# EAGLE board uC board (EAGLE 9.4.1)
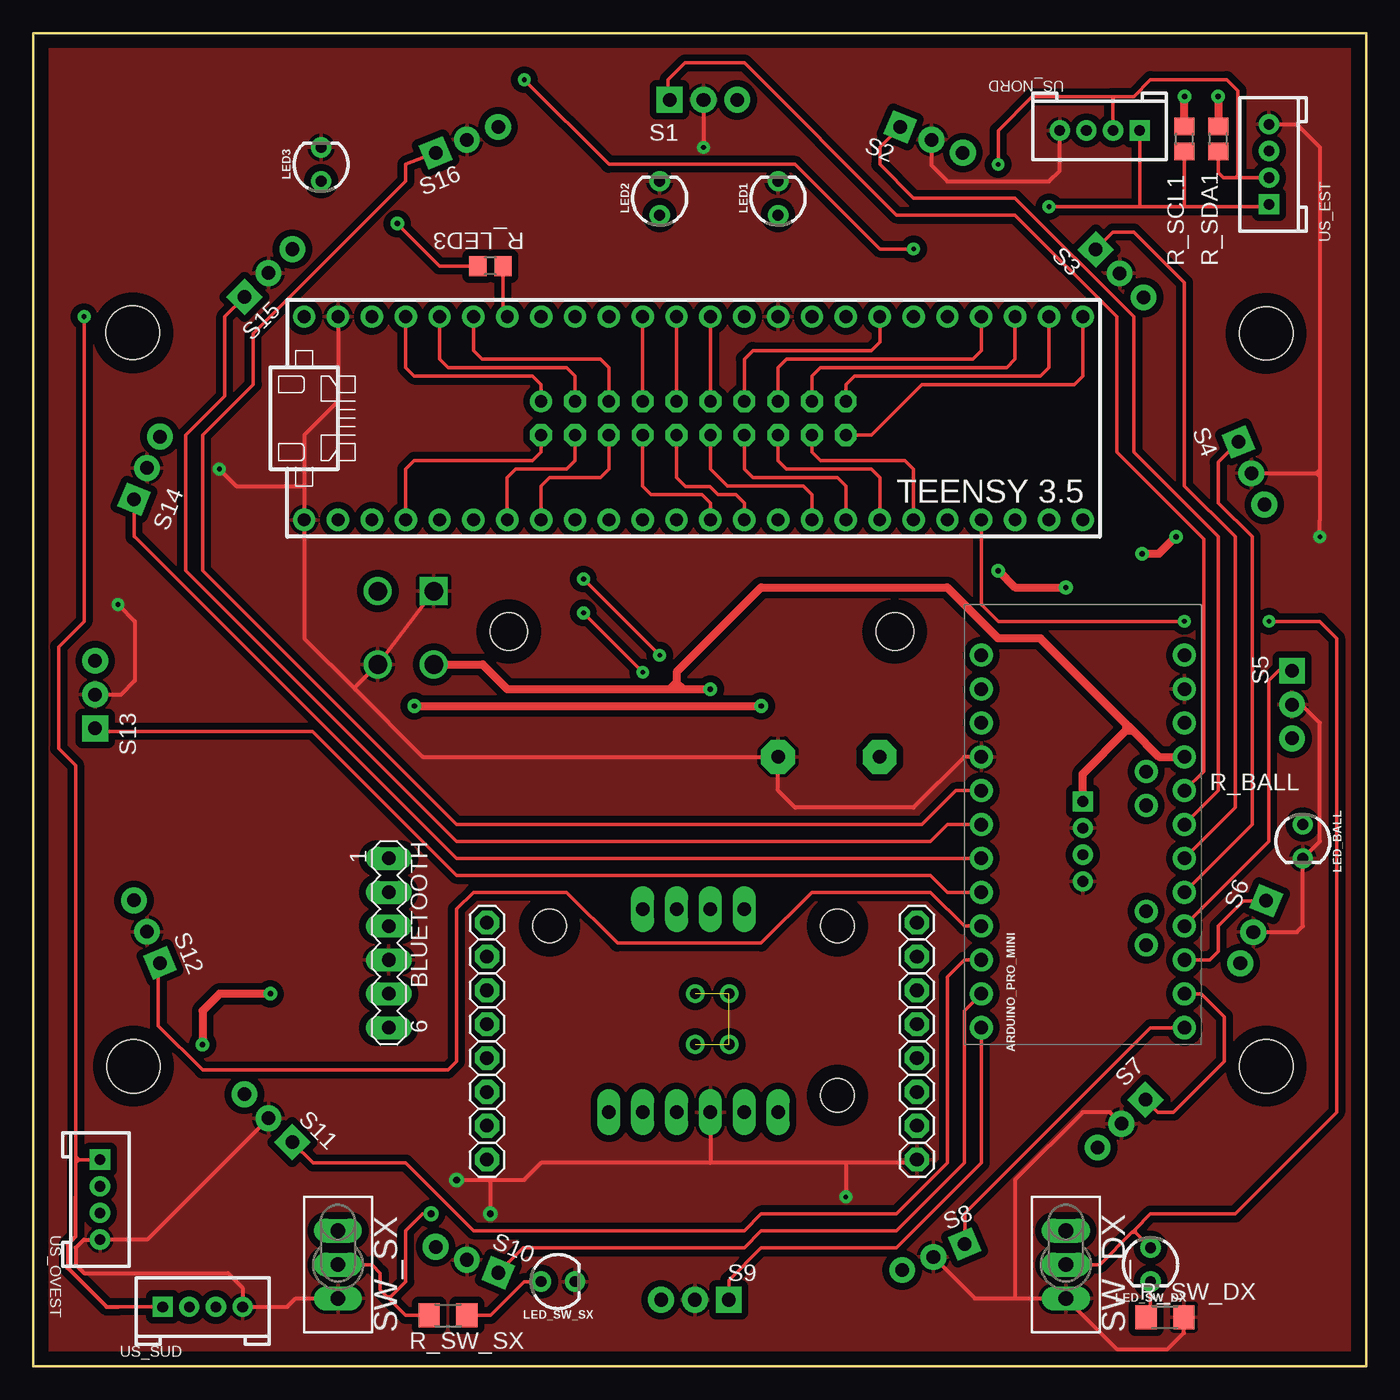
[diagram p0: board, top side]
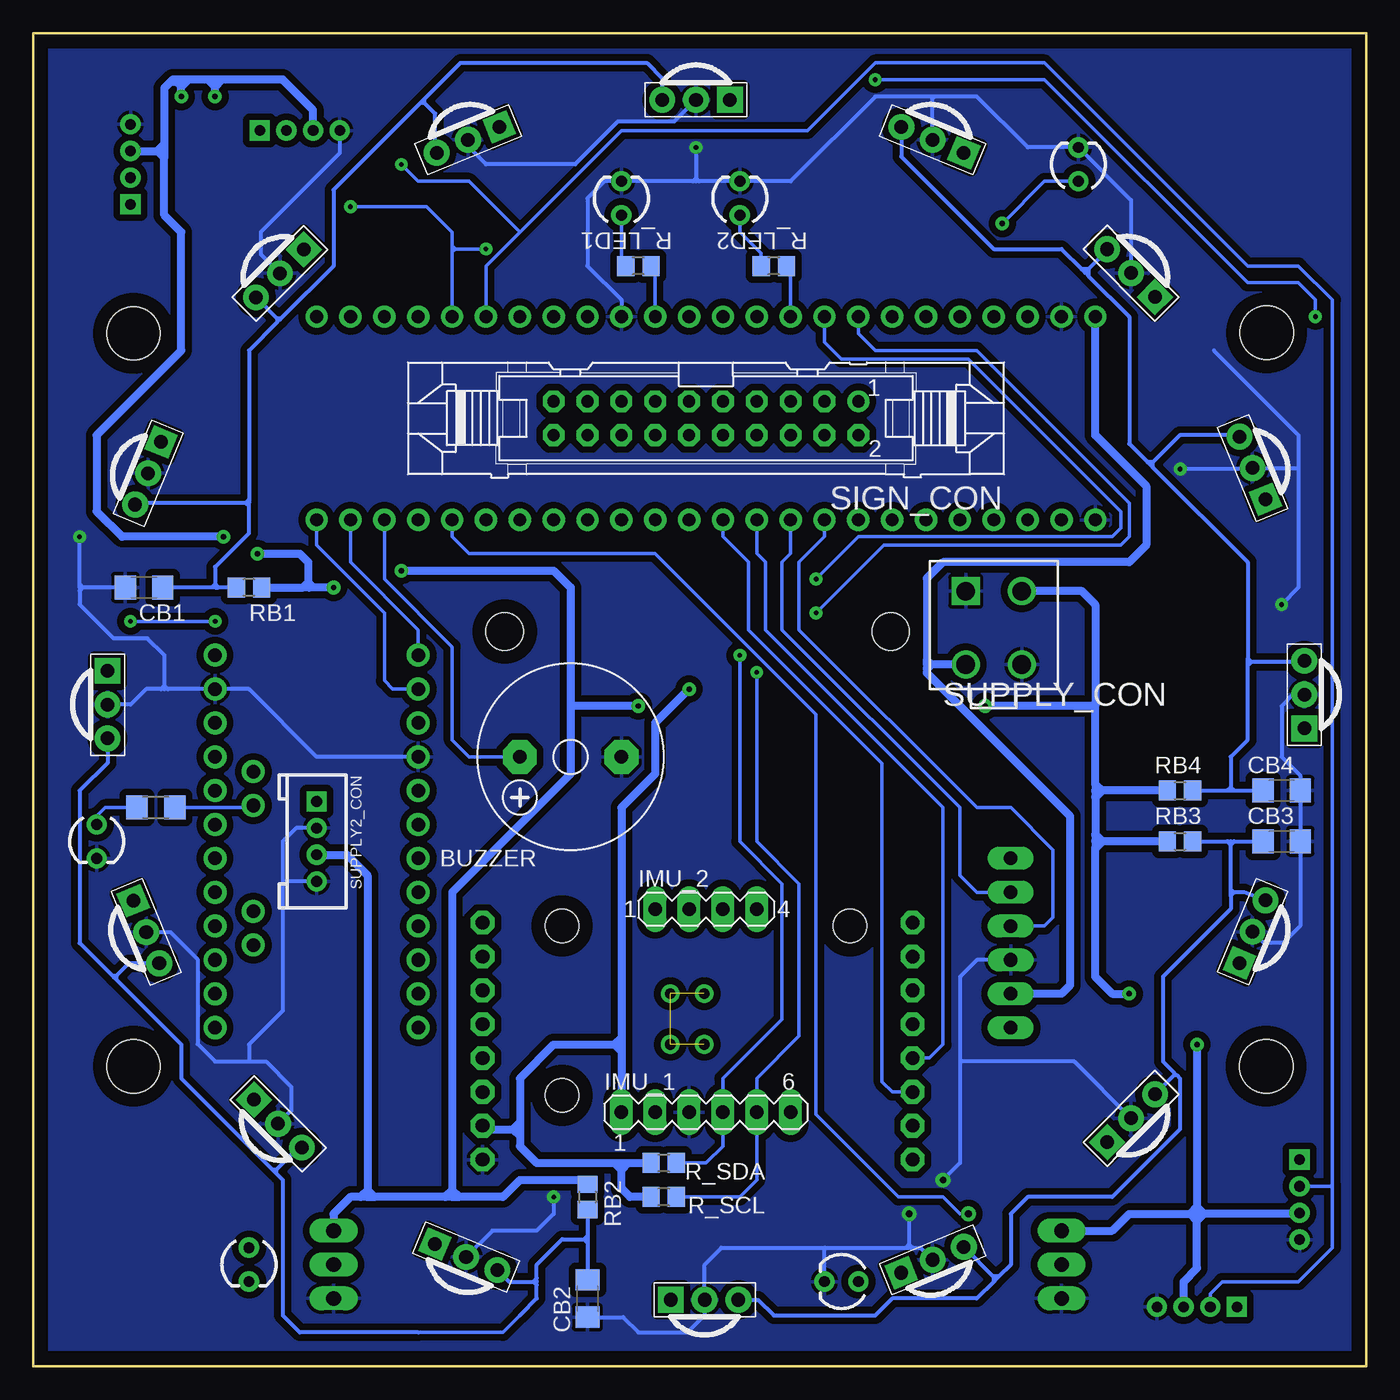
[diagram p1: board, bottom side, seen from below]

Size 100 x 100 mm. Coordinates in mm from the lower left corner, seen from the top.
Outline: 0,0 100,0 100,100 0,100 0,0
Copper layers (1*16): Top 0.035mm / dielectric 1.5mm / Bottom 0.035mm
Design rules "default *": minimum track width 6mil, minimum drill 0.35mm, track to track 5mil, track to pad 7mil, pad to pad 10mil, via to via 10mil, smd to smd 6mil, copper to edge 40mil, drill to drill 6mil, minimum pad ring 14mil, minimum via ring 12mil, stop-mask expansion 4mil, vias tented up to drill 0mil, thermal gap 10mil
Net classes: 0 signal: width 0.254 mm, clearance 0.254 mm; 1 Power: width 0.305 mm, clearance 0.305 mm; 2 +5V/1: width 0.61 mm, drill 0.406 mm, clearance 0.457 mm
Holes 2.8 mm at 64.64,55.12 35.68,55.12
Holes 2.54 mm at 60.33,33.02 38.73,33.02 60.33,20.32
Holes 4 mm at 92.5,77.5 7.46,77.54 92.5,22.5 7.5,22.5

## Footprints (pad centres in the part's own frame; a part is rotated, then mirrored left to right if it is on the bottom)
ARDUINO_PRO_MINI = drill 1.016: 1 -7.62,12.7; 2 -7.62,10.16; 3 -7.62,7.62; 4 -7.62,5.08; 5 -7.62,2.54; 6 -7.62,0; 7 -7.62,-2.54; 8 -7.62,-5.08; 9 -7.62,-7.62; 10 -7.62,-10.16; 11 -7.62,-12.7; 12 -7.62,-15.24; 13 7.62,-15.24; 14 7.62,-12.7; 15 7.62,-10.16; 16 7.62,-7.62; 17 7.62,-5.08; 18 7.62,-2.54; 19 7.62,0; 20 7.62,2.54; 21 7.62,5.08; 22 7.62,7.62; 23 7.62,10.16; 24 7.62,12.7; A4 4.763,1.429; A5 4.763,3.969; A6 4.763,-9.049; A7 4.763,-6.509
MA06-1 = drill 1.016 long: 1 -6.35,0; 2 -3.81,0; 3 -1.27,0; 4 1.27,0; 5 3.81,0; 6 6.35,0
F/CM12P = drill 1.016 pad 2.54 octagon: + 3.81,0; - -3.81,0
C1206 = smd 1.6 x 1.8: 1 -1.4,0; 2 1.4,0
MA04-1 = drill 1.016 long: 1 -3.81,0; 2 -1.27,0; 3 1.27,0; 4 3.81,0
39-28-1043 = drill 1.4 pad 2.1 square: 1 -2.1,7.35 | drill 1.4 pad 2.1: 2 2.1,7.35; 3 -2.1,1.85; 4 2.1,1.85
LED_3MM = drill 0.813: A -1.27,0; K 1.27,0
R1206 = smd 1.6 x 1.803: 1 -1.422,0; 2 1.422,0
R0805 = smd 1.3 x 1.5: 1 -0.95,0; 2 0.95,0
PNA460XM = drill 1.016 pad 1.93 square: 1 -2.54,0 | drill 1.016 pad 1.93: 2 0,0; 3 2.54,0
20V = drill 0.914: 1 -11.43,-1.27 | drill 0.914 octagon: 2 -11.43,1.27; 3 -8.89,-1.27; 4 -8.89,1.27; 5 -6.35,-1.27; 6 -6.35,1.27; 7 -3.81,-1.27; 8 -3.81,1.27; 9 -1.27,-1.27; 10 -1.27,1.27; 11 1.27,-1.27; 12 1.27,1.27; 13 3.81,-1.27; 14 3.81,1.27; 15 6.35,-1.27; 16 6.35,1.27; 17 8.89,-1.27; 18 8.89,1.27; 19 11.43,-1.27; 20 11.43,1.27
2.0_1X4 = drill 0.8 pad 1.27 square: 1 -3,0 | drill 0.8 pad 1.27: 2 -1,0; 3 1,0; 4 3,0
TL3XPO = drill 1.1 pad 1.422 long: 1 -2.54,0; 2 0,0; 3 2.54,0
TEENSY_3.5/3.6 = drill 0.965: 0/RX -25.4,-7.62; 1/TX -22.86,-7.62; 2 -20.32,-7.62; 3/CANTX -17.78,-7.62; 3V3 7.62,-7.62; 3V3_LO -22.86,7.62; 4/CANRX -15.24,-7.62; 5 -12.7,-7.62; 6 -10.16,-7.62; 7 -7.62,-7.62; 8 -5.08,-7.62; 9/CS -2.54,-7.62; 10/CS 0,-7.62; 11/MOSI 2.54,-7.62; 12/MISO 5.08,-7.62; 13/SCK 5.08,7.62; 14/A0 2.54,7.62; 15/A1 0,7.62; 16/A2 -2.54,7.62; 17/A3 -5.08,7.62; 18/A4/SDA -7.62,7.62; 19/A5/SCL -10.16,7.62; 20/A6 -12.7,7.62; 21/A7 -15.24,7.62; 21/DAC0 12.7,7.62; 22/A8 -17.78,7.62; 23/A9 -20.32,7.62; 24 10.16,-7.62; 25 12.7,-7.62; 26 15.24,-7.62; 27 17.78,-7.62; 28 20.32,-7.62; 29 22.86,-7.62; 30 25.4,-7.62; 31/A12 27.94,-7.62; 32/A13 30.48,-7.62; 33/A14 30.48,7.62; 34/A15 27.94,7.62; 35/A16 25.4,7.62; 36/A17 22.86,7.62; 37/A18 20.32,7.62; 38/A19 17.78,7.62; 39/A20 15.24,7.62; A22/DAC1 10.16,7.62; AGND -25.4,7.62; GND -27.94,-7.62; GND2 7.62,7.62; VIN -27.94,7.62
OPENMV3 = drill 1.016 pad 1.778 octagon: 11 1.651,19.304; 12 1.651,16.764; 13 1.651,14.224; 14 1.651,11.684; 15 1.651,9.144; 16 1.651,6.604; 17 1.651,4.064; 18 1.651,1.524; 21 33.909,19.304; 22 33.909,16.764; 23 33.909,14.224; 24 33.909,11.684; 25 33.909,9.144; 26 33.909,6.604; 27 33.909,4.064; 28 33.909,1.524

## Placement (x,y rotation side)
ARDUINO_PRO_MINI  ARDUINO_PRO_MINI  [ARDUINO_PRO_MINI]  78.74,40.64 0 top
BLUETOOTH  [MA06-1]  26.67,31.75 270 top
BUZZER  F/CM12P  [F/CM12P]  59.69,45.72 180 bottom
CB1  0.1uF  [C1206]  91.69,58.42 180 bottom
CB2  0.1uF  [C1206]  58.42,5.08 270 bottom
CB3  0.1uF  [C1206]  6.35,39.37 0 bottom
CB4  0.1uF  [C1206]  6.35,43.18 0 bottom
IMU_1  [MA06-1]  49.53,19.05 0 bottom
IMU_2  [MA04-1]  49.53,34.29 0 bottom
J1  39-28-1043  [39-28-1043]  27.94,50.8 0 bottom
LED1  [LED_3MM]  55.88,87.63 90 top
LED2  [LED_3MM]  46.99,87.63 90 top
LED3  [LED_3MM]  21.59,90.17 90 top
LED_BALL  [LED_3MM]  95.25,39.37 270 top
LED_SW_DX  [LED_3MM]  83.82,7.62 270 top
LED_SW_SX  [LED_3MM]  39.37,6.35 0 top
R_BALL  330  [R1206]  90.81,41.91 0 bottom
R_LED1  68/75  [R0805]  54.61,82.55 180 bottom
R_LED2  68/75  [R0805]  44.45,82.55 180 bottom
R_LED3  68/75  [R0805]  34.29,82.55 180 top
R_SCL  3.3k  [R0805]  52.7,12.7 180 bottom
R_SCL1  3.3k  [R0805]  86.36,92.08 90 top
R_SDA  3.3k  [R0805]  52.7,15.24 180 bottom
R_SDA1  3.3k  [R0805]  88.9,92.08 90 top
R_SW_DX  330  [R1206]  84.9,3.68 180 top
R_SW_SX  330  [R1206]  31.11,3.81 180 top
RB1  33  [R0805]  83.82,58.42 180 bottom
RB2  33  [R0805]  58.42,12.7 270 bottom
RB3  33  [R0805]  13.97,39.37 0 bottom
RB4  33  [R0805]  13.97,43.18 0 bottom
S1  PNA460XM  [PNA460XM]  50.28,95.01 180 bottom
S2  PNA460XM  [PNA460XM]  67.39,92.01 202.5 bottom
S3  PNA460XM  [PNA460XM]  81.5,81.99 225 bottom
S4  PNA460XM  [PNA460XM]  91.39,66.99 247.5 bottom
S5  PNA460XM  [PNA460XM]  94.43,49.64 270 bottom
S6  PNA460XM  [PNA460XM]  91.53,32.57 292.5 bottom
S7  PNA460XM  [PNA460XM]  81.64,18.19 315 bottom
S8  PNA460XM  [PNA460XM]  67.53,8.19 337.5 bottom
S9  PNA460XM  [PNA460XM]  49.64,4.98 0 bottom
S10  PNA460XM  [PNA460XM]  32.53,7.98 22.5 bottom
S11  PNA460XM  [PNA460XM]  17.64,18.6 45 bottom
S12  PNA460XM  [PNA460XM]  8.53,32.6 67.5 bottom
S13  PNA460XM  [PNA460XM]  4.64,50.39 90 bottom
S14  PNA460XM  [PNA460XM]  8.53,67.39 112.5 bottom
S15  PNA460XM  [PNA460XM]  17.64,82.01 135 bottom
S16  PNA460XM  [PNA460XM]  32.53,92.01 157.5 bottom
SIGN_CON  [20V]  49.53,71.12 180 bottom
SUPPLY2_CON  TWIG_2.0  [2.0_1X4]  78.74,39.37 270 bottom
SW_DX  TL38PO  [TL3XPO]  77.47,7.62 270 top
SW_SX  TL38PO  [TL3XPO]  22.86,7.62 270 top
TEENSY_3.5  TEENSY_3.5/3.6  [TEENSY_3.5/3.6]  48.26,71.12 0 top
U$2  OPENMV3  [OPENMV3]  32.38,13.97 0 top
US_EST  TWIG_2.0  [2.0_1X4]  92.71,90.17 90 top
US_NORD  TWIG_2.0  [2.0_1X4]  80.01,92.71 180 top
US_OVEST  TWIG_2.0  [2.0_1X4]  5,12.5 270 top
US_SUD  TWIG_2.0  [2.0_1X4]  12.7,4.45 0 top

## Library data of the parts
ARDUINO_PRO_MINI = SparkFun-Boards
BLUETOOTH IMU_1 IMU_2 = con-lstb; OC_FARNELL: unknown; OC_NEWARK: unknown
BUZZER = buzzer; OC_FARNELL: unknown; OC_NEWARK: unknown
CB1-CB4 = rcl; SPICEPREFIX: C
J1 = 39-28-1043; DESCRIPTION: Mini-Fit Jr. Vertical Header, 4.20mm Pitch, Dual Row, 4 Circuits, without Snap-in Plastic Peg PCB Lock, Tin, Natural; HEIGHT: mm; MANUFACTURER_NAME: Molex; MANUFACTURER_PART_NUMBER: 39-28-1043; MOUSER_PART_NUMBER: 538-39-28-1043; MOUSER_PRICE-STOCK: https://www.mouser.com/Search/Refine.aspx?Keyword=538-39-28-1043; RS_PART_NUMBER: 4841899P; RS_PRICE-STOCK: http://uk.rs-online.com/web/p/products/4841899P
LED1-LED3 LED_BALL LED_SW_DX LED_SW_SX = SparkFun-LED; PROD_ID: DIO-08794
R_BALL R_LED1-R_LED3 R_SCL R_SCL1 R_SDA R_SDA1 R_SW_DX R_SW_SX RB1-RB4 = rcl; SPICEPREFIX: R
S1-S16 = Adafruit
SIGN_CON = con-harting-v-edit; OC_FARNELL: unknown; OC_NEWARK: unknown
SUPPLY2_CON US_EST US_NORD US_OVEST US_SUD = CONNECTER
SW_DX SW_SX = switch
TEENSY_3.5 = Teensy356
U$2 = openmv

## Nets
+5V: ARDUINO_PRO_MINI.21 BLUETOOTH.5 IMU_1.1 J1.3 R_SCL.2 R_SDA.2 SUPPLY2_CON.1 TEENSY_3.5.VIN U$2.27
+5V/S [+5V/1]: J1.2 R_SCL1.2 R_SDA1.2 RB1.1 RB2.1 RB3.1 RB4.1 SUPPLY2_CON.3 SW_DX.1 SW_SX.1 US_EST.3 US_NORD.3 US_OVEST.3 US_SUD.3
A21: TEENSY_3.5.21/DAC0
A22: TEENSY_3.5.A22/DAC1
BUZZ: BUZZER.+ TEENSY_3.5.30
GND [Power]: ARDUINO_PRO_MINI.4 ARDUINO_PRO_MINI.23 BLUETOOTH.4 BUZZER.- CB1.2 CB2.2 CB3.2 CB4.2 IMU_1.3 J1.1 J1.4 LED1.K LED2.K LED3.K LED_BALL.K LED_SW_SX.K R_SW_DX.1 S1.2 S2.2 S3.2 S4.2 S5.2 S6.2 S7.2 S8.2 S9.2 S10.2 S11.2 S12.2 S13.2 S14.2 S15.2 S16.2 SUPPLY2_CON.2 SUPPLY2_CON.4 SW_DX.3 SW_SX.3 TEENSY_3.5.AGND TEENSY_3.5.GND TEENSY_3.5.GND2 U$2.28 US_EST.4 US_NORD.4 US_OVEST.4 US_SUD.4
M1_INA: SIGN_CON.8 TEENSY_3.5.11/MOSI
M1_INB: SIGN_CON.10 TEENSY_3.5.12/MISO
M1_PWM: SIGN_CON.2 TEENSY_3.5.2
M2_INA: SIGN_CON.12 TEENSY_3.5.24
M2_INB: SIGN_CON.14 TEENSY_3.5.25
M2_PWM: SIGN_CON.4 TEENSY_3.5.5
M3_INA: SIGN_CON.16 TEENSY_3.5.26
M3_INB: SIGN_CON.18 TEENSY_3.5.27
M3_PWM: SIGN_CON.6 TEENSY_3.5.6
M4_INA: SIGN_CON.3 TEENSY_3.5.22/A8
M4_INB: SIGN_CON.5 TEENSY_3.5.21/A7
M4_PWM: SIGN_CON.1 TEENSY_3.5.23/A9
N$1: R_LED1.1 TEENSY_3.5.13/SCK
N$2: LED1.A R_LED1.2
N$3: LED_BALL.A R_BALL.1
N$4: ARDUINO_PRO_MINI.A4 R_BALL.2
N$5: LED_SW_SX.A R_SW_SX.1
N$6: LED2.A R_LED2.2
N$7: LED3.A R_LED3.2
N$8: R_LED3.1 TEENSY_3.5.20/A6
N$9: LED_SW_DX.K R_SW_DX.2
N$10: R_LED2.1 TEENSY_3.5.17/A3
POWER_BLOK_1: CB2.1 RB2.2 S5.3 S6.3 S7.3 S8.3
POWER_BLOK_2: CB1.1 RB1.2 S1.3 S2.3 S3.3 S4.3
POWER_BLOK_3: CB3.1 RB3.2 S9.3 S10.3 S11.3 S12.3
POWER_BLOK_4: CB4.1 RB4.2 S13.3 S14.3 S15.3 S16.3
RAW: ARDUINO_PRO_MINI.24
RX1: TEENSY_3.5.0/RX
RX2: TEENSY_3.5.9/CS U$2.15
RX3: BLUETOOTH.3 TEENSY_3.5.7
RX4: ARDUINO_PRO_MINI.1 TEENSY_3.5.31/A12
S1_IN: SIGN_CON.20 TEENSY_3.5.33/A14
S1_OUT: SIGN_CON.19 TEENSY_3.5.34/A15
S2_IN: SIGN_CON.17 TEENSY_3.5.35/A16
S2_OUT: SIGN_CON.15 TEENSY_3.5.36/A17
S3_IN: SIGN_CON.13 TEENSY_3.5.39/A20
S3_OUT: SIGN_CON.11 TEENSY_3.5.14/A0
S4_IN: SIGN_CON.9 TEENSY_3.5.15/A1
S4_OUT: SIGN_CON.7 TEENSY_3.5.16/A2
SCL1: R_SCL1.1 TEENSY_3.5.37/A18 US_EST.1 US_NORD.1 US_OVEST.1 US_SUD.1
SCL_I2C: IMU_1.5 R_SCL.1 TEENSY_3.5.19/A5/SCL
SCL_I2C2: TEENSY_3.5.3/CANTX
SDA1: R_SDA1.1 TEENSY_3.5.38/A19 US_EST.2 US_NORD.2 US_OVEST.2 US_SUD.2
SDA_I2C: IMU_1.4 R_SDA.1 TEENSY_3.5.18/A4/SDA
SDA_I2C2: TEENSY_3.5.4/CANRX
SP1: ARDUINO_PRO_MINI.20 S1.1
SP2: ARDUINO_PRO_MINI.19 S2.1
SP3: ARDUINO_PRO_MINI.18 S3.1
SP4: ARDUINO_PRO_MINI.17 S4.1
SP5: ARDUINO_PRO_MINI.16 S5.1
SP6: ARDUINO_PRO_MINI.15 S6.1
SP7: ARDUINO_PRO_MINI.14 S7.1
SP8: ARDUINO_PRO_MINI.13 S8.1
SP9: ARDUINO_PRO_MINI.12 S9.1
SP10: ARDUINO_PRO_MINI.11 S10.1
SP11: ARDUINO_PRO_MINI.10 S11.1
SP12: ARDUINO_PRO_MINI.9 S12.1
SP13: ARDUINO_PRO_MINI.8 S13.1
SP14: ARDUINO_PRO_MINI.7 S14.1
SP15: ARDUINO_PRO_MINI.6 S15.1
SP16: ARDUINO_PRO_MINI.5 S16.1
SW_DX: LED_SW_DX.A SW_DX.2 TEENSY_3.5.29
SW_SX: R_SW_SX.2 SW_SX.2 TEENSY_3.5.28
TX1: TEENSY_3.5.1/TX
TX2: TEENSY_3.5.10/CS U$2.16
TX3: BLUETOOTH.2 TEENSY_3.5.8
TX4: ARDUINO_PRO_MINI.2 TEENSY_3.5.32/A13

## Tracks (layer width: path | path; a pad name or v marks a point on that pad's centre or on a via)
+5V  (via drill 0.41)
  Top 0.61: J1.3 33.71,52.65 35.56,50.8 47.75,50.8 | 47.75,50.8 48.26,50.8 | 48.26,50.8 48.77,50.8 | 48.77,50.8 v50.8,50.8 | 48.26,50.8 48.26,51.31 | 48.26,51.31 48.26,52.07 54.61,58.42 68.58,58.42 72.39,54.61 75.56,54.61 81.98,48.2 | ARDUINO_PRO_MINI.21 84.45,45.72 82.49,47.69 | 82.49,47.69 82.23,47.94 | 82.23,47.94 81.98,48.2 | 47.75,50.8 48.26,51.31 | 48.26,51.31 48.77,50.8 | SUPPLY2_CON.1 78.74,44.45 81.98,47.69 | 82.23,47.94 81.98,47.69 | 81.98,48.2 81.98,47.69 | 81.98,47.69 82.49,47.69
  Bottom 0.61: TEENSY_3.5.VIN 20.32,69.85 16.51,66.04 16.51,61.59 17.78,60.33 31.75,60.33 32.96,59.12 32.96,52.96 | 32.96,52.96 32.96,52.7 | 32.96,52.7 32.96,52.32 | 32.96,52.32 32.96,52.01 22.23,41.27 22.23,28.57 22.86,27.94 BLUETOOTH.5 | J1.3 32.63,52.65 | 32.63,52.65 32.9,52.65 32.96,52.7 | 32.96,52.32 32.63,52.65 | 32.63,52.65 32.94,52.96 32.96,52.96 | v50.8,50.8 53.34,48.26 53.34,44.45 55.88,41.91 55.88,24.64 | 55.88,24.64 55.88,24.13 | 55.88,24.13 55.88,23.62 | 55.88,23.62 IMU_1.1 | 55.88,24.13 56.39,24.13 | 56.39,24.13 60.96,24.13 63.5,21.59 63.5,18.29 | 63.5,18.29 63.5,17.78 | 63.5,17.78 63.5,17.27 | 63.5,17.27 63.5,16.51 62.23,15.24 56.39,15.24 | 56.39,15.24 55.88,15.24 | 55.88,15.24 55.37,15.24 | 55.37,15.24 R_SDA.2 | R_SCL.2 55.24,12.7 55.88,13.34 55.88,14.73 | 55.88,14.73 55.88,15.24 | U$2.27 66.04,17.78 64.01,17.78 | 63.5,17.78 64.01,17.78 | 63.5,18.29 64.01,17.78 | 64.01,17.78 63.5,17.27 | 55.37,15.24 55.88,14.73 | 55.88,14.73 56.39,15.24 | 55.88,24.64 56.39,24.13 | 56.39,24.13 55.88,23.62
+5V/S  (via drill 0.41)
  Top 0.61: v72.39,59.69 73.66,58.42 v77.47,58.42 | v83.19,60.96 84.45,60.96 v85.72,62.23 | v88.9,95.25 R_SDA1.2 | R_SCL1.2 v86.36,95.25 | v12.7,24.13 12.7,26.67 13.97,27.94 v17.78,27.94 | v28.57,49.53 v54.61,49.53
  Bottom 0.61: v77.47,58.42 78.99,58.42 | 78.99,58.42 79.25,58.42 | 79.38,58.42 79.25,58.42 | 79.38,58.42 79.5,58.42 | 79.5,58.42 79.76,58.42 | RB1.1 79.76,58.42 | v83.19,60.96 80.01,60.96 79.38,60.33 79.38,58.67 | 79.38,58.42 79.38,58.67 | 79.38,58.67 79.25,58.55 79.25,58.42 | 79.38,58.67 79.5,58.55 79.5,58.42 | SW_DX.1 77.47,11.43 76.2,12.7 75.44,12.7 | 68.07,12.7 64.77,12.7 63.5,13.97 58.74,13.97 RB2.1 | 68.58,12.7 68.07,12.7 | 68.58,12.7 69.09,12.7 | 69.09,12.7 74.42,12.7 | 74.93,12.7 74.42,12.7 | 74.93,12.7 75.44,12.7 | v85.72,62.23 93.34,62.23 95.25,64.14 95.25,69.85 88.9,76.2 88.9,85.09 90.17,86.36 90.17,90.68 | US_NORD.3 79.01,94.25 81.28,96.52 85.85,96.52 | 89.72,96.33 90.17,95.89 90.17,91.69 | 89.72,96.33 89.53,96.52 89.41,96.52 | 90.17,91.69 90.17,91.19 | 90.17,91.19 90.17,90.68 | US_EST.3 90.68,91.17 | 90.66,91.17 90.19,91.17 90.17,91.19 | 78.99,58.42 79.25,58.67 79.38,58.67 | 79.38,58.67 79.5,58.67 79.76,58.42 | 85.85,96.52 86.36,96.52 | 86.36,96.52 86.87,96.52 | 86.87,96.52 88.39,96.52 | 88.39,96.52 88.9,96.52 | 88.9,96.52 89.41,96.52 | v86.36,95.25 86.36,96.01 | 86.36,96.01 86.36,96.52 | v88.9,95.25 88.9,96.01 | 88.9,96.01 88.9,96.52 | 85.85,96.52 86.36,96.01 | 86.87,96.52 86.36,96.01 | 88.39,96.52 88.9,96.01 | 89.41,96.52 89.22,96.33 | 89.22,96.33 88.9,96.01 | 89.22,96.33 89.72,96.33 | 90.17,91.69 90.68,91.19 90.68,91.17 | 90.17,90.68 90.66,91.17 | 90.66,91.17 90.68,91.17 | v72.39,59.69 60.96,59.69 59.69,58.42 59.69,49.53 | 20.32,43.69 20.32,49.53 | 20.32,49.53 20.32,57.15 21.32,58.15 J1.2 | 20.32,43.69 20.32,43.18 | 20.32,43.18 20.32,42.67 | 20.32,42.67 20.32,39.88 | 20.32,39.88 20.32,39.37 | 20.32,39.37 20.32,38.86 | 20.32,38.86 20.32,29.21 19.05,27.94 v17.78,27.94
  Bottom 0.61: RB4.1 19.81,43.18 | 19.81,43.18 20.32,43.18 | RB3.1 19.81,39.37 | 20.32,39.37 19.81,39.37 | 20.32,43.69 19.81,43.18 | 19.81,43.18 20.32,42.67 | 20.32,39.88 19.81,39.37 | 19.81,39.37 20.32,38.86 | 59.69,49.53 59.69,44.45 68.58,35.56 68.58,13.21 | 12.7,11.43 12.19,11.43 | 12.19,11.43 5.07,11.43 US_OVEST.3 | v12.7,24.13 12.7,11.94 | 12.7,11.94 12.7,11.43 | 12.7,11.43 12.7,10.92 | US_SUD.3 13.7,6.35 12.7,7.35 12.7,10.92 | 13.21,11.43 17.78,11.43 19.05,10.16 SW_SX.1 | 13.21,11.43 12.7,11.43 | 12.7,11.94 12.19,11.43 | 12.19,11.43 12.7,10.92 | 12.7,10.92 13.21,11.43 | 13.21,11.43 12.7,11.94 | 20.32,49.53 v28.57,49.53 | v54.61,49.53 59.69,49.53 | 68.58,13.21 68.58,12.7 | 68.07,12.7 68.58,13.21 | 68.58,13.21 69.09,12.7 | SUPPLY2_CON.3 76.47,38.37 74.93,36.83 74.93,13.21 | 74.93,13.21 74.93,12.7 | 74.42,12.7 74.93,13.21 | 74.93,13.21 75.44,12.7
BUZZ
  Bottom 0.254: BUZZER.+ 67.31,45.72 68.58,46.99 68.58,53.98 73.66,59.05 TEENSY_3.5.30
GND  (via drill 0.35, 0.5)
  Top 0.305: TEENSY_3.5.AGND 22.86,72.39 20.32,69.85 20.32,66.04 | 20.32,66.04 TEENSY_3.5.GND 20.32,54.61 24.13,50.8 | v13.95,67.31 15.22,66.04 20.32,66.04 | S1.2 v50.28,91.44 | S2.2 67.39,90.09 68.58,88.9 76.2,88.9 77.01,89.71 US_NORD.4 | v6.35,57.15 7.62,55.88 7.62,51.44 6.58,50.39 S13.2 | IMU_1.3 50.8,15.24 | U$2.28 66.04,15.24 60.96,15.24 | 60.96,15.24 50.8,15.24 | 50.8,15.24 38.1,15.24 36.83,13.97 34.29,13.97 | S7.2 80.78,19.05 78.74,19.05 73.66,13.97 73.66,5.08 | 73.66,5.08 SW_DX.3 81.28,1.27 85.09,1.27 86.32,2.5 R_SW_DX.1 | S8.2 70.64,5.08 73.66,5.08 | ARDUINO_PRO_MINI.4 69.85,45.72 66.04,41.91 57.15,41.91 55.88,43.18 BUZZER.- 29.21,45.72 24.13,50.8 | 60.96,15.24 v60.96,12.7 | S6.2 94.8,32.57 95.25,33.02 LED_BALL.K 96.52,39.37 96.52,48.26 95.14,49.64 S5.2 | v96.53,62.22 96.53,63.49 96.52,63.5 96.52,66.74 | US_EST.4 94.79,93.17 96.52,91.44 96.52,67.24 | 96.52,67.24 96.52,66.93 | 96.52,66.93 96.52,66.74 | S4.2 96.27,66.99 | 96.27,66.99 96.46,66.99 96.52,66.93 | 96.52,67.24 96.27,66.99 | 96.27,66.99 96.52,66.74 | S11.2 8.54,9.5 US_OVEST.4 3.79,9.5 3.17,8.89 3.17,7.62 3.81,6.99 14.61,6.99 15.7,5.89 US_SUD.4 19.05,4.45 19.68,5.08 SW_SX.3 | v31.75,13.97 34.29,13.97 | v34.29,11.43 34.29,13.97 | 24.13,50.8 24.13,50.94 J1.4 J1.1
  Bottom 0.305: v13.95,67.31 8.61,67.31 S14.2 5.16,67.39 5.08,67.31 | S1.2 51.92,93.37 56.15,93.37 59.35,90.17 66.04,90.17 67.39,91.52 S2.2 | v6.35,57.15 5.08,58.42 5.08,67.31 | BLUETOOTH.4 29.21,30.48 30.48,29.21 30.48,22.86 | S11.2 21.9,22.86 30.48,22.86 | v31.75,13.97 30.48,15.24 30.48,22.86 | v34.29,11.43 34.29,9.14 | 34.29,8.89 34.29,9.14 | 40.64,8.89 48.37,8.89 49.64,7.62 S9.2 49.64,3.81 50.91,2.54 54.61,2.54 55.75,3.68 CB2.2 | 40.64,8.89 34.54,8.89 | 34.54,8.89 34.29,8.89 | LED_SW_SX.K 40.64,8.89 | S5.2 92.71,49.64 91.55,50.8 90.42,50.8 | v60.96,12.7 60.96,11.43 62.23,10.16 65.56,10.16 S8.2 | S6.2 89.72,32.57 87.68,30.53 87.68,24.18 86.36,22.86 83.82,22.86 | S7.2 80.64,19.18 80.64,20.95 82.55,22.86 83.82,22.86 | 89.92,50.8 ARDUINO_PRO_MINI.23 83.82,50.8 78.74,45.72 ARDUINO_PRO_MINI.4 | 89.92,50.8 90.17,50.8 | 90.17,50.8 90.42,50.8 | 90.17,50.8 90.17,51.05 | 90.17,51.05 90.17,53.34 91.44,54.61 93.98,54.61 96.53,57.16 96.53,58.17 | 96.53,58.42 96.53,58.67 | 96.53,58.67 v96.53,62.22 | CB1.2 96.28,58.42 | 96.28,58.42 96.53,58.42 | S3.2 82.94,83.43 82.94,85.09 77.01,91.02 US_NORD.4 | TEENSY_3.5.GND2 55.88,80.01 58.42,82.55 58.42,87.63 57.15,88.9 LED1.K 50.52,88.9 | 5.08,67.31 5.08,69.85 11.43,76.2 | S13.2 5.49,50.39 6.35,49.53 6.35,45.72 4.95,44.32 CB4.2 CB3.2 4.95,33.02 6.22,31.75 7.68,31.75 S12.2 | S10.2 33.44,8.89 34.04,8.89 | 34.29,8.89 34.04,8.89 | 34.04,8.89 34.29,9.14 | 34.29,9.14 34.54,8.89 | 50.04,88.9 LED2.K 43.18,88.9 36.83,95.25 32.38,95.25 | 50.04,88.9 50.29,88.9 | 50.29,88.9 50.52,88.9 | v50.28,91.44 50.28,89.14 | 50.28,89.14 50.28,88.91 50.29,88.9 | 50.04,88.9 50.28,89.14 | 50.28,89.14 50.52,88.9
  Bottom 0.305: 96.53,58.42 96.53,58.17 | 96.53,58.67 96.28,58.42 | 96.28,58.42 96.53,58.17 | 89.92,50.8 90.17,51.05 | 90.17,51.05 90.42,50.8 | SUPPLY2_CON.2 80.28,40.37 81.28,39.37 81.28,36.32 | 81.28,36.32 81.28,26.67 83.82,24.13 83.82,22.86 | SUPPLY2_CON.4 81.23,36.37 81.28,36.32 | S15.2 17.64,87.49 LED3.K 25.4,91.44 29.21,95.25 32.38,95.25 | S16.2 32.53,95.11 32.38,95.25
  pour Top (isolate 0.508): -1.27,101.6 102.87,101.6 102.87,-2.54 -1.27,-2.54
  pour Bottom (isolate 0.508): -2.54,102.87 101.6,102.87 101.6,-1.27 -2.54,-1.27
GND1  (via drill 0.8)  (3 unrouted)
  other vias: 49.67,24.14 52.21,24.14 49.67,27.95 52.21,27.95
M1_INA
  Top 0.254: SIGN_CON.8 45.72,66.04 46.35,65.41 50.16,65.41 50.8,64.77 TEENSY_3.5.11/MOSI
M1_INB
  Top 0.254: TEENSY_3.5.12/MISO 53.34,64.77 52.7,65.41 51.35,65.41 50.76,66 48.94,66 48.26,66.67 SIGN_CON.10
M1_PWM
  Top 0.254: SIGN_CON.2 38.1,68.58 37.47,67.94 28.57,67.94 27.94,67.31 TEENSY_3.5.2
M2_INA
  Top 0.254: SIGN_CON.12 50.8,67.31 52.07,66.04 57.78,66.04 58.42,65.41 TEENSY_3.5.24
M2_INB
  Top 0.254: SIGN_CON.14 53.34,67.31 53.98,66.67 60.33,66.67 60.96,66.04 TEENSY_3.5.25
M2_PWM
  Top 0.254: TEENSY_3.5.5 35.56,66.67 36.2,67.31 40.01,67.31 40.64,67.94 SIGN_CON.4
M3_INA
  Top 0.254: SIGN_CON.16 55.88,67.94 56.52,67.31 62.87,67.31 63.5,66.67 TEENSY_3.5.26
M3_INB
  Top 0.254: SIGN_CON.18 58.42,68.58 59.05,67.94 64.77,67.94 65.41,67.94 66.04,67.31 TEENSY_3.5.27
M3_PWM
  Top 0.254: SIGN_CON.6 43.18,67.31 42.55,66.67 38.73,66.67 38.1,66.04 TEENSY_3.5.6
M4_INA
  Top 0.254: TEENSY_3.5.22/A8 30.48,75.56 31.11,74.93 40.01,74.93 40.64,74.3 SIGN_CON.3
M4_INB
  Top 0.254: TEENSY_3.5.21/A7 33.02,76.2 33.66,75.56 42.55,75.56 43.18,74.93 SIGN_CON.5
M4_PWM
  Top 0.254: SIGN_CON.1 38.1,73.66 37.47,74.3 28.57,74.3 27.94,74.93 TEENSY_3.5.23/A9
N$1
  Bottom 0.254: TEENSY_3.5.13/SCK 53.34,82.23 R_LED1.1
N$2
  Bottom 0.254: LED1.A 55.88,82.87 R_LED1.2
N$3
  Bottom 0.254: R_BALL.1 94.61,41.91 95.25,41.27 LED_BALL.A
N$4
  Bottom 0.254: R_BALL.2 83.66,41.91 ARDUINO_PRO_MINI.A4
N$5
  Top 0.254: LED_SW_SX.A 36.83,6.35 34.29,3.81 R_SW_SX.1
N$6
  Bottom 0.254: LED2.A 46.99,85.09 45.4,83.5 R_LED2.2
N$7  (via drill 0.41)
  Top 0.254: R_LED3.2 30.48,82.55 v27.3,85.72
  Bottom 0.254: v27.3,85.72 24.13,88.9 LED3.A
N$8
  Top 0.254: TEENSY_3.5.20/A6 35.24,79.06 R_LED3.1
N$9
  Top 0.254: LED_SW_DX.K 83.82,4.03 R_SW_DX.2
N$10
  Bottom 0.254: TEENSY_3.5.17/A3 43.18,82.23 R_LED2.1
POWER_BLOK_1
  Bottom 0.254: 58.42,9.53 58.67,9.53 | 62.23,6.35 62.48,6.35 | 81.92,14.61 81.79,14.73 | 80.13,16.39 S7.3 | 92.83,30.22 92.84,30.23 | 93.92,29.15 93.79,29.27 | 63.5,3.81 64.77,2.54 71.12,2.54
  Bottom 0.305: RB2.2 58.42,9.78 | 58.42,9.78 58.42,9.53 58.42,9.27 | 58.42,9.27 CB2.1 | S5.3 94.43,45.27 96.52,43.18 96.52,31.75 94.04,29.27 | 63.5,3.81 62.23,5.08 62.23,6.1 | 62.23,6.1 62.23,6.35 62.23,6.6 | 62.23,6.6 62.23,7.62 60.33,9.53 58.67,9.53 | 82.04,14.73 88.9,21.59 88.9,24.13 93.79,29.02 | 82.04,14.73 81.92,14.61 81.79,14.48 | 81.79,14.48 81.28,13.97 81.28,3.81 80.01,2.54 71.12,2.54 | 58.67,9.53 58.42,9.27 | 58.67,9.53 58.42,9.78 | S8.3 64.31,6.35 62.48,6.35 | 62.48,6.35 62.23,6.6 | 62.48,6.35 62.23,6.1 | 80.13,16.39 81.79,14.73 | 81.79,14.73 81.79,14.48 | 81.79,14.73 82.04,14.73 | 93.79,29.02 93.92,29.15 94.04,29.27 | S6.3 92.83,30.22 | 92.84,30.23 93.79,29.27 | 93.79,29.27 94.04,29.27 | 93.79,29.27 93.79,29.02
POWER_BLOK_2
  Bottom 0.254: S2.3 69.85,91.15 | 92.23,64.77 S4.3 | 83.82,64.77 84.07,64.77 | 70.8,94.93 70.67,94.81 | 81.59,78.49 81.53,78.49 | 81.69,78.59 81.66,78.61 | 86.36,58.42 86.36,58.67
  Bottom 0.305: RB1.2 86.11,58.42 | 86.11,58.42 86.36,58.42 86.61,58.42 | 86.61,58.42 CB1.1 | S1.3 52.82,96.64 53.98,97.79 67.94,97.79 70.67,95.06 | 69.85,91.15 69.85,93.98 70.67,94.81 | 83.82,64.52 83.82,64.77 83.82,65.02 | 83.82,65.02 83.82,76.2 81.69,78.33 | 84.07,64.77 92.23,64.77 | 84.07,64.77 83.82,65.02 | 84.07,64.77 83.82,64.52 | 70.67,95.06 70.8,94.93 70.93,94.81 | 70.93,94.81 70.67,94.81 | 70.67,95.06 70.67,94.81 | 81.41,78.61 77.47,82.55 77.47,88.27 70.93,94.81 | 81.41,78.61 81.53,78.49 81.69,78.33 | S3.3 81.69,78.59 | 81.59,78.49 81.69,78.59 | 81.69,78.59 81.69,78.33 | 81.66,78.61 81.41,78.61 | 86.36,58.67 86.36,59.97 83.82,62.51 83.82,64.52 | 86.11,58.42 86.36,58.67 | 86.36,58.67 86.61,58.42
POWER_BLOK_3
  Bottom 0.254: 10.16,39.37 10.16,39.12 | 10.16,35.56 9.91,35.56 10.16,35.81 | 27.77,6.54 27.75,6.54 | 27.94,6.73 27.95,6.72 27.94,6.71
  Bottom 0.305: RB3.2 10.41,39.37 | 10.41,39.37 10.16,39.37 9.91,39.37 | 9.91,39.37 CB3.1 | 10.16,35.31 10.16,34.29 15.24,29.21 15.24,22.86 14.4,22.02 | 10.16,35.31 10.16,35.56 10.16,35.81 10.16,39.12 | 9.91,39.37 10.16,39.12 | 10.16,39.12 10.41,39.37 | S12.3 9.14,35.56 9.91,35.56 10.16,35.31 | 27.56,6.73 26.67,7.62 26.67,11.43 25.4,12.7 19.05,12.7 13.97,17.78 13.97,21.59 14.22,21.84 | 27.56,6.73 27.75,6.54 27.94,6.35 | 27.94,6.35 29.21,5.08 35.56,5.08 36.83,3.81 44.45,3.81 45.62,4.98 S9.3 | S10.3 27.95,6.72 | 27.77,6.54 27.94,6.71 27.94,6.35 | 27.56,6.73 27.94,6.73 | 14.4,22.02 14.22,21.84 | S11.3 14.4,21.84 | 14.4,21.84 14.22,21.84 | 14.4,21.84 14.4,22.02
POWER_BLOK_4
  Bottom 0.254: 10.16,43.18 10.16,43.43 | 8.89,52.83 8.64,52.83 | 4.74,52.83 S13.3 | 21.08,82.04 20.83,81.79 | 19.44,83.69 S15.3
  Bottom 0.305: RB4.2 10.41,43.18 | 10.41,43.18 10.16,43.18 9.91,43.18 | 9.91,43.18 CB4.1 | 10.16,43.43 10.16,45.72 8.89,46.99 8.89,52.58 | 8.89,52.58 8.89,52.83 8.89,53.09 | 8.89,53.09 8.89,60.33 16,67.44 | 4.74,52.83 8.64,52.83 | 8.64,52.83 8.89,53.09 | 8.64,52.83 8.89,52.58 | 21.34,82.3 22.86,83.82 27.94,83.82 34.88,90.76 S16.3 | 21.34,82.3 21.08,82.04 20.83,82.3 | S14.3 9.62,69.85 13.97,69.85 16,67.82 | 19.44,83.69 20.83,82.3 | 20.83,82.3 21.34,82.3 | 20.83,82.3 20.83,81.79 17.78,78.74 17.78,69.22 16.38,67.82 | 9.91,43.18 10.16,43.43 | 10.16,43.43 10.41,43.18 | 16.38,67.82 16.19,67.63 | 16.19,67.63 16,67.44 | 16,67.82 16.19,67.63 | 16,67.44 16,67.82 | 16,67.82 16.38,67.82
RX2
  Bottom 0.254: TEENSY_3.5.9/CS 45.72,60.96 45.09,60.33 45.09,55.24 31.75,41.91 31.75,24.13 32.77,23.11 U$2.15
RX3
  Bottom 0.254: TEENSY_3.5.7 40.64,62.23 42.55,60.33 42.55,55.24 29.21,41.91 26.67,41.91 23.5,38.73 23.5,33.66 24.13,33.02 BLUETOOTH.3
RX4
  Bottom 0.254: TEENSY_3.5.31/A12 76.2,60.33 71.12,55.24 ARDUINO_PRO_MINI.1
S1_IN
  Top 0.254: TEENSY_3.5.33/A14 78.74,74.3 78.11,73.66 66.67,73.66 62.87,69.85 SIGN_CON.20
S1_OUT
  Top 0.254: TEENSY_3.5.34/A15 76.2,74.93 75.56,74.3 61.59,74.3 60.96,73.66 SIGN_CON.19
S2_IN
  Top 0.254: TEENSY_3.5.35/A16 73.66,75.56 73.03,74.93 59.05,74.93 58.42,74.3 SIGN_CON.17
S2_OUT
  Top 0.254: TEENSY_3.5.36/A17 71.12,76.2 70.48,75.56 56.52,75.56 55.88,74.93 SIGN_CON.15
S3_IN
  Top 0.254: TEENSY_3.5.39/A20 63.5,76.83 62.87,76.2 53.98,76.2 53.34,75.56 SIGN_CON.13
S3_OUT
  Top 0.254: TEENSY_3.5.14/A0 SIGN_CON.11
S4_IN
  Top 0.254: TEENSY_3.5.15/A1 SIGN_CON.9
S4_OUT
  Top 0.254: TEENSY_3.5.16/A2 SIGN_CON.7
SCL1  (via drill 0.35)
  Top 0.254: v76.2,87 82.88,87 | 82.88,87 83.06,87 | 83.06,87 83.14,87 | 83.14,87 86.23,87 | 86.36,87 86.23,87 | 86.36,87 86.49,87 | 86.49,87 92.53,87 US_EST.1 | R_SCL1.1 86.36,87.12 | 86.36,87.12 86.36,87 | US_NORD.1 83.01,87.12 | 83.01,87.12 83.01,87.04 83.06,87 | 86.23,87 86.36,87.12 | 86.36,87.12 86.49,87 | 82.88,87 83.01,87.12 | 83.14,87 83.01,87.12 | US_OVEST.1 3.43,15.49 | 3.43,15.49 3.17,15.49 | v66.04,83.82 63.5,83.82 57.15,90.17 43.18,90.17 v36.83,96.52 | US_SUD.1 6.35,4.45 | 3.17,15.75 3.17,45.09 1.91,46.35 1.91,53.98 3.81,55.88 v3.81,78.74 | 3.17,15.75 3.17,15.49 | 3.17,12.7 3.17,15.24 | 3.17,15.24 3.17,15.49 | 3.17,15.75 3.43,15.49 | 3.43,15.49 3.17,15.24
  Top 0.305: 6.35,4.45 5.49,4.45 2.56,7.37 2.56,9.14 3.17,9.75 3.17,12.7
  Bottom 0.254: TEENSY_3.5.37/A18 68.58,83.57 | 68.58,83.57 68.58,83.82 | v66.04,83.82 68.33,83.82 | 68.58,83.82 68.33,83.82 | 68.58,83.82 68.58,84.07 | 68.58,84.07 68.58,85.09 70.48,87 v76.2,87 | 68.33,83.82 68.58,84.07 | 68.33,83.82 68.58,83.57 | v36.83,96.52 24.13,96.52 8.89,81.28 5.08,81.28 3.81,80.01 v3.81,78.74
SCL_I2C  (via drill 0.35)
  Top 0.254: v45.72,52.07 v41.27,56.52
  Bottom 0.254: TEENSY_3.5.19/A5/SCL 38.1,77.47 36.83,76.2 29.21,76.2 17.78,64.77 17.78,62.23 18.41,61.59 36.2,61.59 v41.27,56.52 | v45.72,52.07 45.72,39.37 42.55,36.2 42.55,24.77 45.72,21.59 IMU_1.5 45.72,13.97 46.99,12.7 R_SCL.1
SDA1  (via drill 0.35)
  Top 0.254: v72.39,90.17 72.39,92.71 74.93,95.25 80.88,95.25 | 80.88,95.25 81.03,95.25 | 81.03,95.25 81.15,95.25 | US_NORD.2 81.01,95.12 | 81.01,95.12 81.01,95.23 81.03,95.25 | 81.15,95.25 81.03,95.12 81.01,95.12 | 81.01,95.12 80.88,95.25 | 81.15,95.25 82.55,95.25 83.82,96.52 89.53,96.52 90.38,95.68 90.38,89.38 | R_SDA1.1 88.9,89.53 89.27,89.17 90.17,89.17 | 90.17,89.17 90.38,89.17 | US_EST.2 90.55,89.17 | 90.55,89.17 90.38,89.17 | 90.38,89.35 90.38,89.17 | 90.17,89.17 90.38,89.38 | 90.38,89.38 90.38,89.35 | 90.38,89.35 90.55,89.17
  Bottom 0.254: TEENSY_3.5.38/A19 66.04,82.55 63.5,85.09 | v72.39,90.17 71.12,88.9 67.31,88.9 63.5,85.09 | 63.5,85.09 55.88,92.71 41.91,92.71 36.83,97.79 24.13,97.79 8.89,82.55 5.08,82.55 2.54,80.01 2.54,13.59 | US_SUD.2 11.7,5.45 10.79,6.35 5.08,6.35 2.54,8.89 2.54,13.37 | 2.54,13.59 2.54,13.46 | 2.54,13.46 2.54,13.37 | US_OVEST.2 2.67,13.5 | 2.67,13.5 2.58,13.5 2.54,13.46 | 2.54,13.37 2.67,13.5 | 2.67,13.5 2.58,13.59 2.54,13.59
SDA_I2C  (via drill 0.35)
  Top 0.254: v41.27,59.05 v46.99,53.34
  Bottom 0.254: v46.99,53.34 46.99,39.37 43.81,36.2 43.81,26.04 48.26,21.59 IMU_1.4 48.26,16.51 49.53,15.24 R_SDA.1 | TEENSY_3.5.18/A4/SDA 40.64,76.83 39.37,75.56 29.84,75.56 18.41,64.14 18.41,62.87 19.05,62.23 38.1,62.23 v41.27,59.05
SP1
  Top 0.254: S1.1 47.62,95.12 47.62,96.52 48.9,97.79 53.34,97.79 64.77,86.36 73.66,86.36 81.28,78.74 81.28,68.58 87.81,62.05 87.81,44.63 ARDUINO_PRO_MINI.20
SP2
  Top 0.254: ARDUINO_PRO_MINI.19 88.9,43.18 88.9,62.23 82.55,68.58 82.55,78.74 73.66,87.63 66.04,87.63 63.5,90.17 63.5,91.44 S2.1
SP3
  Top 0.254: S3.1 81.01,85.09 82.55,85.09 86.36,81.28 86.36,66.04 90.17,62.23 90.17,41.91 ARDUINO_PRO_MINI.18
SP4
  Top 0.254: ARDUINO_PRO_MINI.17 91.44,40.64 91.44,62.23 88.9,64.77 88.9,67.82 S4.1
SP5
  Top 0.254: ARDUINO_PRO_MINI.16 92.71,39.37 92.71,51.44 93.45,52.18 S5.1
SP6
  Top 0.254: ARDUINO_PRO_MINI.15 88.27,30.48 88.9,31.11 88.9,33.02 90.8,34.92 S6.1
SP7
  Top 0.254: ARDUINO_PRO_MINI.14 87.63,27.94 89.36,26.21 89.36,22.86 85.55,19.05 84.37,19.05 S7.1
SP8
  Top 0.254: ARDUINO_PRO_MINI.13 83.82,25.4 69.88,11.46 S8.1
SP9
  Top 0.254: ARDUINO_PRO_MINI.12 71.12,15.24 64.77,8.89 54.61,8.89 52.18,6.46 S9.1
SP10
  Top 0.254: ARDUINO_PRO_MINI.11 69.85,26.67 69.85,15.24 64.77,10.16 54.61,10.16 53.34,8.89 36.76,8.89 S10.1
SP11
  Top 0.254: S11.1 21,15.24 27.94,15.24 33.02,10.16 53.34,10.16 54.61,11.43 64.77,11.43 68.58,15.24 68.58,29.21 69.85,30.48 ARDUINO_PRO_MINI.10
SP12
  Top 0.254: ARDUINO_PRO_MINI.9 69.85,33.02 67.31,35.56 62.23,35.56 58.42,35.56 54.61,31.75 43.81,31.75 40.01,35.56 33.02,35.56 31.75,34.29 31.75,22.86 31.11,22.23 12.7,22.23 9.38,25.54 9.38,30.13 S12.1
SP13
  Top 0.254: ARDUINO_PRO_MINI.8 68.58,35.56 67.31,36.83 31.75,36.83 20.95,47.62 4.87,47.62 S13.1
SP14
  Top 0.254: ARDUINO_PRO_MINI.7 31.75,38.1 20.32,49.53 7.62,62.23 7.56,62.23 S14.1
SP15
  Top 0.254: ARDUINO_PRO_MINI.6 68.58,40.64 67.31,39.37 31.75,39.37 11.43,59.69 11.43,69.85 14.37,72.79 14.37,78.74 S15.1
SP16
  Top 0.254: ARDUINO_PRO_MINI.5 69.22,43.18 66.67,40.64 31.75,40.64 12.7,59.69 12.7,69.85 16.51,73.66 16.51,77.47 27.94,88.9 27.94,90.17 S16.1
SW_DX  (via drill 0.35)
  Top 0.254: v86.36,55.88 72.39,55.88 71.12,57.15 TEENSY_3.5.29 | v92.71,55.88 96.52,55.88 97.79,54.61 97.79,19.05 90.17,11.43 83.82,11.43 82.68,10.29 | SW_DX.2 80.01,7.62 82.42,10.03 | 82.42,10.03 82.55,10.16 | 82.55,10.16 82.68,10.29 | LED_SW_DX.A 82.68,10.03 | 82.68,10.03 82.55,10.16 | 82.42,10.03 82.68,10.03 | 82.68,10.03 82.68,10.29
  Bottom 0.254: v86.36,55.88 v92.71,55.88
SW_SX  (via drill 0.5)
  Top 0.254: 26.54,5.21 26.04,5.71 26.04,6.99 25.4,7.62 SW_SX.2 | 26.54,5.21 26.67,5.08 | 26.67,5.08 26.8,4.95 | 26.8,4.95 27.94,3.81 R_SW_SX.2 | 26.67,5.08 26.8,5.21 | 26.8,5.21 27.94,6.35 27.94,10.16 29.21,11.43 v29.84,11.43 | 26.54,5.21 26.8,5.21 | 26.8,5.21 26.8,4.95
  Bottom 0.254: TEENSY_3.5.28 68.58,62.23 67.31,60.96 53.34,60.96 41.27,48.9 41.27,18.9 35.08,12.7 31.75,12.7 30.48,11.43 v29.84,11.43
TX2
  Bottom 0.254: TEENSY_3.5.10/CS 48.26,62.23 46.35,60.33 46.35,55.24 36.32,45.21 36.32,21.34 35.56,20.57 U$2.16
TX3
  Bottom 0.254: TEENSY_3.5.8 43.18,60.96 43.81,60.33 43.81,55.24 30.48,41.91 30.48,36.83 29.21,35.56 BLUETOOTH.2
TX4
  Bottom 0.254: ARDUINO_PRO_MINI.2 73.03,50.8 73.66,51.44 73.66,56.52 78.74,61.59 TEENSY_3.5.32/A13

## Text on the board
tNames: TEENSY 3.5
bNames: SUPPLY_CON